# Altium PCB dakPCB.PcbDoc
Units mil, origin at the board's own origin, x right, y up, seen from the top; angles counter-clockwise.
Board outline 4000 x 5000 mil, 2 copper layers (Top Layer, Bottom Layer); 30 components, 47 nets, 235 pads, 0 vias.
Unrouted connection lines stored in the file: 159.
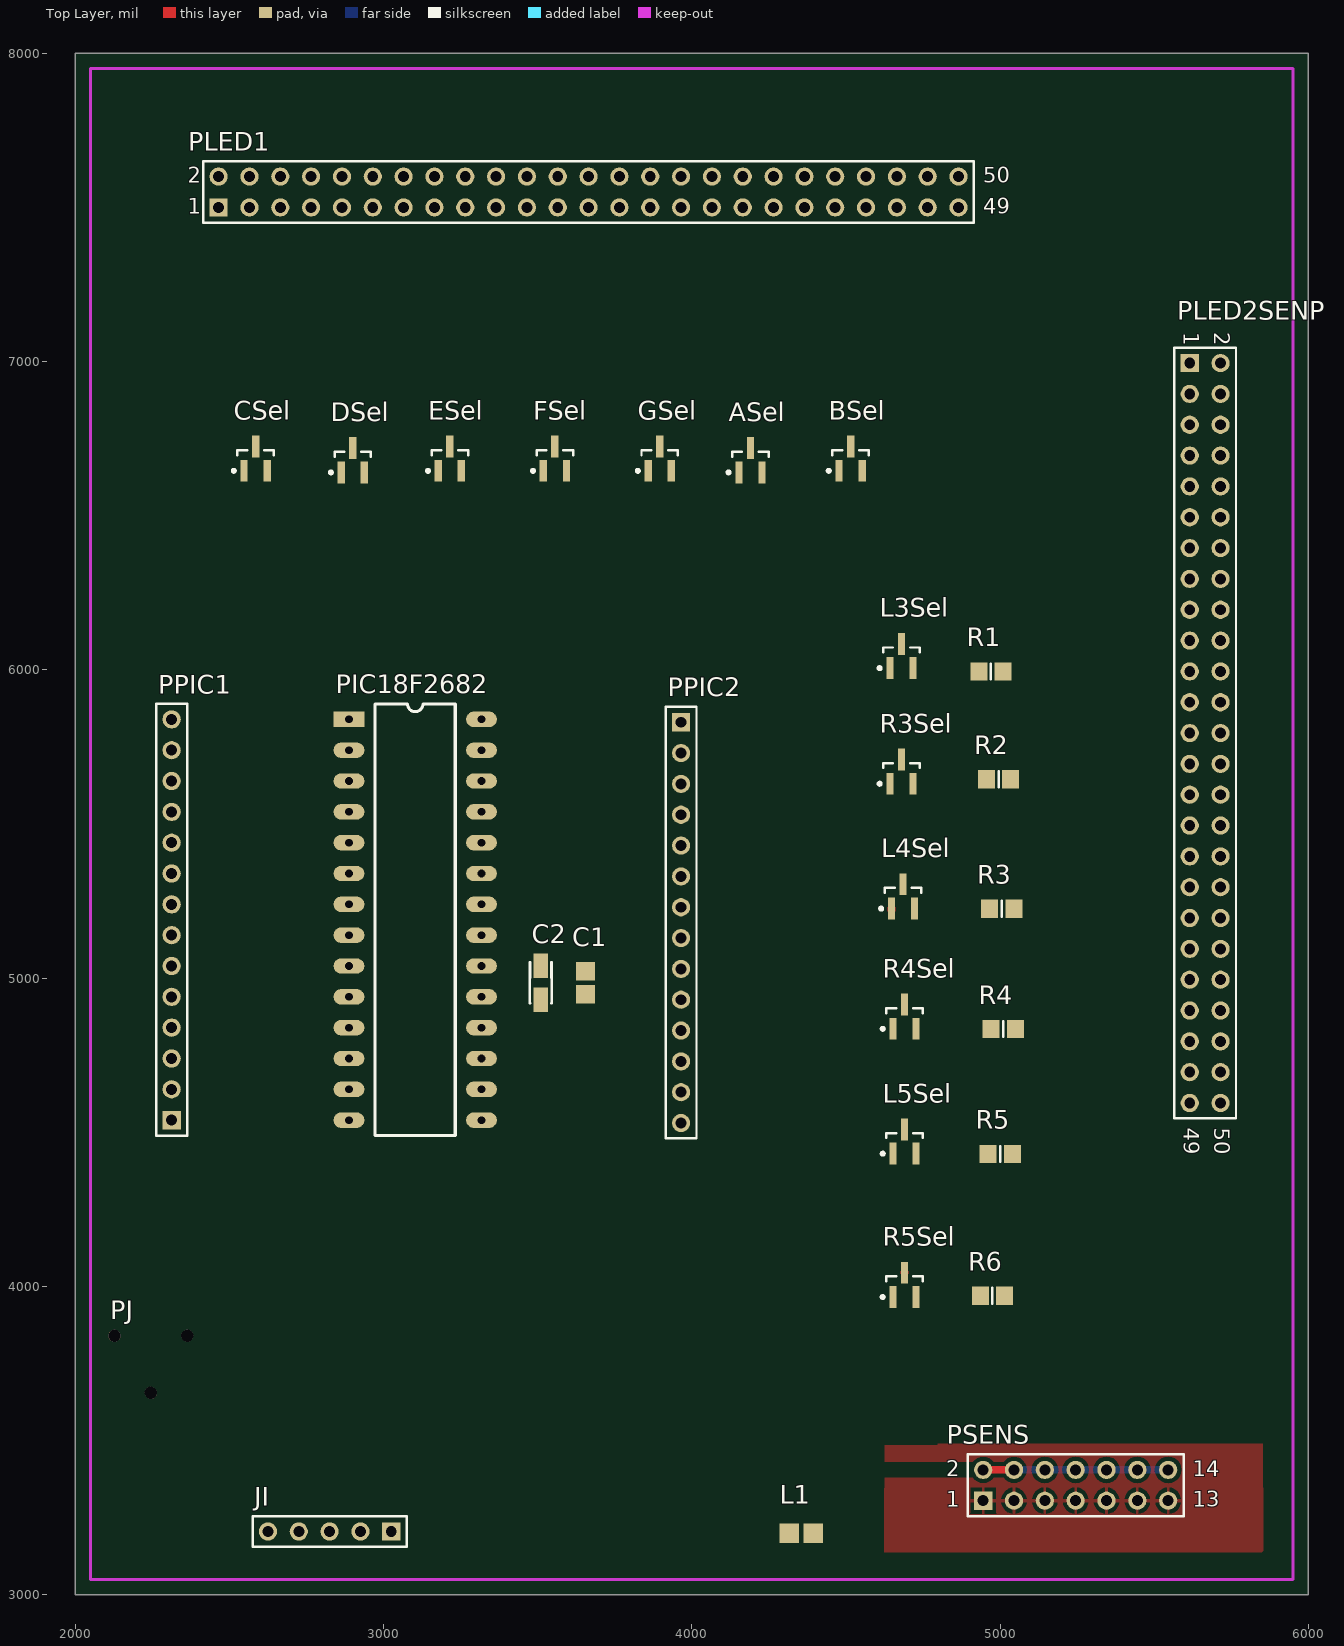
[diagram p0: Top Layer view]
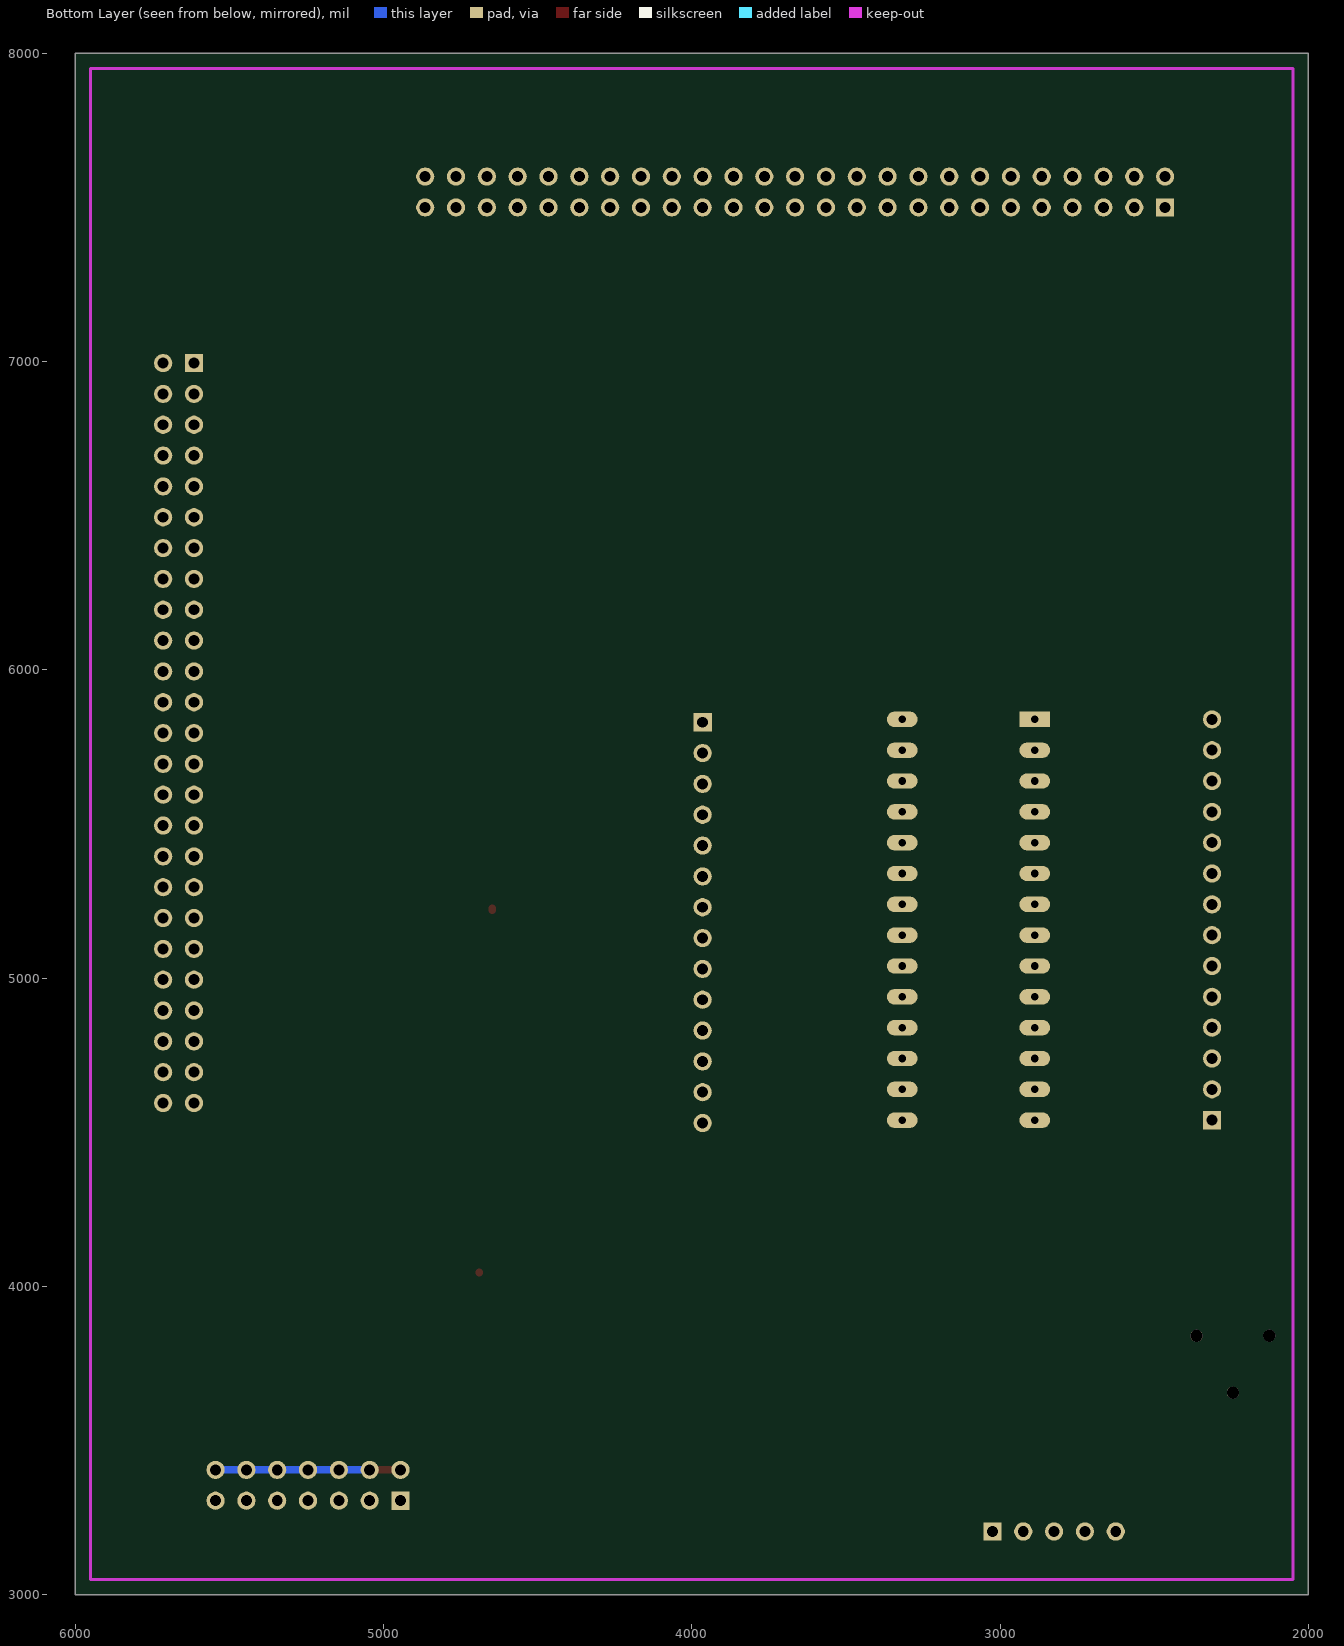
[diagram p1: Bottom Layer view, seen from below]

## Layer stack, top to bottom
Top Layer: signal copper 1.4
Dielectric: dielectric 12.6, FR-4, Dk 4.8
Bottom Layer: signal copper 1.4

## Board outline
2000,3000 6000,3000 6000,8000 2000,8000

## Design rules (kind name [scope] priority, off if disabled: settings)
Clearance [All] p1: gap=13
PolygonConnect [All] p1: connectstyle=Relief reliefconductorwidth=10 reliefentries=4 polygonreliefangle="90 Angle"
RoomDefinition pcblayout [InComponentClass('pcblayout')] p1: confinementstyle=ConfineIn formatcopy=TRUE lockcomponents=FALSE outline 6042.6,3249.37 13672.6,3249.37 13672.6,4769.37 6042.6,4769.37
RoutingVias [All] p1: holewidth=32 width=62 viastyle="Through Hole" minholewidth=28 minwidth=50 maxholewidth=28 maxwidth=50
SilkscreenOverComponentPads [All] p1: minsilkscreentomaskgap=10
SolderMaskExpansion [All] p1: expansion=4
Width [All] p1: maxlimit=25 minlimit=12 preferedwidth=25
27 further rules are at their usual default settings.

## Components (designator, comment, footprint, x,y, rotation, side; value= is the part's Value field where it differs from the comment)
ASel "FDN306P, A" SOT23-3M 4190,6680 r90 top
BSel "FDN306P, B" SOT23-3M 4515,6685 r90 top
C1 "Cap" CAPC2012M 3655,4985 r90 top
C2 "Cap Pol1" TC3216-1206 3510,4985 r270 top
CSel "FDN306P, C" SOT23-3M 2585,6685 r90 top
DSel "FDN306P, D" SOT23-3M 2900,6680 r90 top
ESel "FDN306P, E" SOT23-3M 3215,6685 r90 top
FSel "FDN306P, F" SOT23-3M 3555.63,6685 r90 top
GSel "FDN306P, G" SOT23-3M 3895.63,6685 r90 top
JI "Programming Header" HDR1X5 3025,3205 r180 top
L1 "Inductor" INDC2012M 4355,3200 r180 top
L3Sel "FDN339AN, 3L" SOT23-3M 4680,6045 r90 top
L4Sel "FDN339AN, 4L" SOT23-3M 4685,5265 r90 top
L5Sel "FDN339AN, 5L" SOT23-3M 4690,4470 r90 top
PIC18F2682 "PIC18F2682" DIP28 2887.6,5839.37 r0 top
PJ "Power Jack" "BARREL JACK" 2245,3840 r90 top
PLED1 "50x2 Pin Header, PLED1" HDR2X25 2465,7500 r0 top
PLED2SENP "50x2 Pin Header, PLED2SENP" HDR2X25 5615,6995 r270 top
PPIC1 "Header 14" HDR1X14 2312.6,4539.37 r90 top
PPIC2 "Header 14" HDR1X14 3965,5830 r270 top
PSENS "Header 7X2" HDR2X7 4945,3305 r0 top
R1 "R1" RESC2012M 4970,5995 r180 top
R2 "R2" RESC2012M 4995,5645 r180 top
R3 "R3" RESC2012M 5005,5225 r180 top
R3Sel "FDN339AN, 3R" SOT23-3M 4680,5670 r90 top
R4 "R4" RESC2012M 5010,4835 r180 top
R4Sel "FDN339AN, 4R" SOT23-3M 4690,4875 r90 top
R5 "R5" RESC2012M 5000,4430 r180 top
R5Sel "FDN339AN, 5R" SOT23-3M 4690,4005 r90 top
R6 "R6" RESC2012M 4975,3970 r180 top

## Footprints (in the part's own frame and the unit in brackets; to place one, negate y for a bottom-side part, rotate by r counter-clockwise, add the part's x,y. Pads: shape width x height; smd on the part's side, far side on the other; paste and mask are expansions set on the pad)
"BARREL JACK" [mm]
  round 1 hole 1: 1(0,-3) 2(0,3) 3(-4.7,0)
CAPC2012M [mm] "Chip Capacitor, Body 2.0x1.3mm, IPC Low Density"
  rect 1.5x1.6 smd: 1(-0.95,0) 2(0.95,0)
  body extent -1.1,-0.72 1.1,0.72, height 1.1
DIP28 [mil]
  rect 100x50 hole 25: 1(0,0)
  oval 100x50 hole 25: 2(0,-100) 3(0,-200) 4(0,-300) 5(0,-400) 6(0,-500) 7(0,-600) 8(0,-700) 9(0,-800) 10(0,-900) 11(0,-1000) 12(0,-1100) 13(0,-1200) 14(0,-1300) 15(430,-1300) 16(430,-1200) 17(430,-1100) 18(430,-1000) 19(430,-900) 20(430,-800) 21(430,-700) 22(430,-600) 23(430,-500) 24(430,-400) 25(430,-300) 26(430,-200) 27(430,-100) 28(430,0)
  silkscreen extent 85,-1350 345,50
HDR1X5 [mm] "Connector; Header; 5 Position"
  rect 1.5x1.5 hole 0.9: 1(0,0)
  round 1.5 hole 0.9: 2(2.54,0) 3(5.08,0) 4(7.62,0) 5(10.16,0)
  silkscreen extent -1.27,-1.27 11.43,1.27
HDR1X14 [mm] "Connector; Header; 14 Position"
  rect 1.5x1.5 hole 0.9: 1(0,0)
  round 1.5 hole 0.9: 2(2.54,0) 3(5.08,0) 4(7.62,0) 5(10.16,0) 6(12.7,0) 7(15.24,0) 8(17.78,0) 9(20.32,0) 10(22.86,0) 11(25.4,0) 12(27.94,0) 13(30.48,0) 14(33.02,0)
  silkscreen extent -1.27,-1.27 34.29,1.27
HDR2X7 [mm] "Connector; Header; 7x2 Position"
  rect 1.5x1.5 hole 0.9: 1(0,0)
  round 1.5 hole 0.9: 2(0,2.54) 3(2.54,0) 4(2.54,2.54) 5(5.08,0) 6(5.08,2.54) 7(7.62,0) 8(7.62,2.54) 9(10.16,0) 10(10.16,2.54) 11(12.7,0) 12(12.7,2.54) 13(15.24,0) 14(15.24,2.54)
  silkscreen extent -1.27,-1.27 16.51,3.81
HDR2X25 [mm] "Connector; Header; 25x2 Position"
  rect 1.5x1.5 hole 0.9: 1(0,0)
  round 1.5 hole 0.9: 2(0,2.54) 3(2.54,0) 4(2.54,2.54) 5(5.08,0) 6(5.08,2.54) 7(7.62,0) 8(7.62,2.54) 9(10.16,0) 10(10.16,2.54) 11(12.7,0) 12(12.7,2.54) 13(15.24,0) 14(15.24,2.54) 15(17.78,0) 16(17.78,2.54) 17(20.32,0) 18(20.32,2.54) 19(22.86,0) 20(22.86,2.54) 21(25.4,0) 22(25.4,2.54) 23(27.94,0) 24(27.94,2.54) 25(30.48,0) 26(30.48,2.54) 27(33.02,0) 28(33.02,2.54) 29(35.56,0) 30(35.56,2.54) 31(38.1,0) 32(38.1,2.54) 33(40.64,0) 34(40.64,2.54) 35(43.18,0) 36(43.18,2.54) 37(45.72,0) 38(45.72,2.54) 39(48.26,0) 40(48.26,2.54) 41(50.8,0) 42(50.8,2.54) 43(53.34,0) 44(53.34,2.54) 45(55.88,0) 46(55.88,2.54) 47(58.42,0) 48(58.42,2.54) 49(60.96,0) 50(60.96,2.54)
  silkscreen extent -1.27,-1.27 62.23,3.81
INDC2012M [mm] "Chip Inductor, Body 2.0x1.2mm, IPC Low Density"
  rect 1.6x1.6 smd: 1(-1,0) 2(1,0)
  body extent -1.1,-0.7 1.1,0.7, height 1.1
RESC2012M [mm]
  rect 1.4x1.5 smd: 1(-1,0) 2(1,0)
  silkscreen extent 0,-0.65 0,0.65, body extent -1.07,-0.7 1.07,0.7, height 0.7
SOT23-3M [mm] "SOT23, 3-Leads, Body 2.9x1.3mm, Pitch 0.95mm, Lead Span 2.5mm, IPC Low Density"
  rect 1.8x0.6 smd: 1(-1,0.95) 2(-1,-0.95) 3(1,0)
  silkscreen extent -1.12,-1.5 0.7,1.92, body extent -0.7,-1.5 0.7,1.5, height 1.1
TC3216-1206 [mm] "Capacitor, SM Tantalum; Body 3.2 x 1.6 mm (LxW typ)"
  rect 2x1.2 smd: 1(-1.4,0) 2(1.4,0)
  silkscreen extent -1.7,-0.9 1.7,0.9

## Part data
ASel BSel CSel DSel ESel FSel GSel: library part FDN304P, "Pch MOSFET"
C1: "Capacitor"
C2: "Polarized Capacitor (Radial)"
JI: library part "Header 5", "Header, 5-Pin"
L3Sel L4Sel L5Sel R3Sel R4Sel R5Sel: library part FDN339AN, "Nch MOSFET"
PPIC1 PPIC2: "Header, 14-Pin"
PSENS: "Header, 7-Pin, Dual row"
R1 R2 R3 R4 R5 R6: library part Res1, "Resistor"

## Nets (pads, with @x,y where several pads share a name; then routed paths per layer and width w, separated by ;. In a path a pad name is that pad's centre, name@x,y a point inside that pad or via, vN(x,y) a via of type N, cw(c..) or ccw(c..) an arc to the next point about the centre after c; other vN are vias at no path point)
GND: C1.1 C2.2 JI.5 L3Sel.3 L4Sel.3 L5Sel.3 PIC18F2682.8 PIC18F2682.19 PJ.2 PJ.3 PPIC1.7 PPIC2.10 PSENS.2 PSENS.4 PSENS.6 PSENS.8 PSENS.10 PSENS.12 PSENS.14 R3Sel.3 R4Sel.3 R5Sel.3 | length 600.6
  Top Layer w25: R5Sel.3 R5Sel.3@4690,4045 ; PSENS.2 PSENS.4
  Bottom Layer w25: PSENS.4 PSENS.6 PSENS.8 PSENS.10 PSENS.12 PSENS.14
NetASel_1: ASel.1 PIC18F2682.13 PPIC1.2
NetASel_2: ASel.2 PLED2SENP.14 PLED2SENP.16 PLED2SENP.18 PLED2SENP.20 PLED2SENP.22 PLED2SENP.24
NetBSel_1: BSel.1 PIC18F2682.14 PPIC1.1
NetBSel_2: BSel.2 PLED2SENP.26 PLED2SENP.28 PLED2SENP.30 PLED2SENP.32 PLED2SENP.34 PLED2SENP.36
NetCSel_1: CSel.1 PIC18F2682.6 PPIC1.9
NetCSel_2: CSel.2 PLED1.4 PLED1.6 PLED1.8 PLED1.10 PLED1.12 PLED1.14
NetDSel_1: DSel.1 PIC18F2682.10 PPIC1.5
NetDSel_2: DSel.2 PLED1.16 PLED1.18 PLED1.20 PLED1.22 PLED1.24 PLED1.26
NetESel_1: ESel.1 PIC18F2682.11 PPIC1.4
NetESel_2: ESel.2 PLED1.28 PLED1.30 PLED1.32 PLED1.34 PLED1.36 PLED1.38
NetFSel_1: FSel.1 PIC18F2682.12 PPIC1.3
NetFSel_2: FSel.2 PLED1.40 PLED1.42 PLED1.44 PLED1.46 PLED1.48 PLED1.50
NetGSel_1: GSel.1 JI.3 PIC18F2682.28 PPIC2.1
NetGSel_2: GSel.2 PLED2SENP.2 PLED2SENP.4 PLED2SENP.6 PLED2SENP.8 PLED2SENP.10 PLED2SENP.12
NetJI_2: JI.2 PIC18F2682.1 PPIC1.14
NetJI_4: JI.4 PIC18F2682.27 PPIC2.2 R3Sel.1
NetL1_1: L1.1 PSENS.1 PSENS.3 PSENS.5 PSENS.7 PSENS.9 PSENS.11 PSENS.13
NetL3Sel_1: L3Sel.1 PIC18F2682.26 PPIC2.3
NetL3Sel_2: L3Sel.2 R1.2
NetL4Sel_1: L4Sel.1 PIC18F2682.24 PPIC2.5 | length 4.6
  Top Layer w25: L4Sel.1@4647.6,5221 L4Sel.1
NetL4Sel_2: L4Sel.2 R3.2
NetL5Sel_1: L5Sel.1 PIC18F2682.16 PPIC2.13
NetL5Sel_2: L5Sel.2 R5.2
NetPIC18F2682_2: PIC18F2682.2 PPIC1.13
NetPIC18F2682_3: PIC18F2682.3 PPIC1.12
NetPIC18F2682_4: PIC18F2682.4 PPIC1.11
NetPIC18F2682_5: PIC18F2682.5 PPIC1.10
NetPIC18F2682_7: PIC18F2682.7 PPIC1.8
NetPIC18F2682_9: PIC18F2682.9 PPIC1.6
NetPIC18F2682_15: PIC18F2682.15 PPIC2.14 R5Sel.1
NetPIC18F2682_17: PIC18F2682.17 PPIC2.12
NetPIC18F2682_18: PIC18F2682.18 PPIC2.11
NetPIC18F2682_21: PIC18F2682.21 PPIC2.8
NetPIC18F2682_22: PIC18F2682.22 PPIC2.7
NetPIC18F2682_23: PIC18F2682.23 PPIC2.6
NetPIC18F2682_25: PIC18F2682.25 PPIC2.4
NetPLED1_3: PLED1.3 PLED1.15 PLED1.27 PLED1.39 PLED2SENP.1 PLED2SENP.13 PLED2SENP.25 R1.1
NetPLED1_5: PLED1.5 PLED1.17 PLED1.29 PLED1.41 PLED2SENP.3 PLED2SENP.15 PLED2SENP.27 R2.1
NetPLED1_7: PLED1.7 PLED1.19 PLED1.31 PLED1.43 PLED2SENP.5 PLED2SENP.17 PLED2SENP.29 R3.1
NetPLED1_9: PLED1.9 PLED1.21 PLED1.33 PLED1.45 PLED2SENP.7 PLED2SENP.19 PLED2SENP.31 R4.1
NetPLED1_11: PLED1.11 PLED1.23 PLED1.35 PLED1.47 PLED2SENP.9 PLED2SENP.21 PLED2SENP.33 R5.1
NetPLED1_13: PLED1.13 PLED1.25 PLED1.37 PLED1.49 PLED2SENP.11 PLED2SENP.23 PLED2SENP.35 R6.1
NetR2_2: R2.2 R3Sel.2
NetR4_2: R4.2 R4Sel.2
NetR5Sel_2: R5Sel.2 R6.2
VCC: ASel.3 BSel.3 C1.2 C2.1 CSel.3 DSel.3 ESel.3 FSel.3 GSel.3 JI.1 L1.2 PIC18F2682.20 PJ.1 PPIC2.9
pads on no net: PLED1.1 PLED1.2 PLED2SENP.37 PLED2SENP.38 PLED2SENP.39 PLED2SENP.40 PLED2SENP.41 PLED2SENP.42 PLED2SENP.43 PLED2SENP.44 PLED2SENP.45 PLED2SENP.46 PLED2SENP.47 PLED2SENP.48 PLED2SENP.49 PLED2SENP.50 R4Sel.1

## Polygon pours and split planes (outlines as drawn)
NetL1_1 on Top Layer "Top Layer-No Net" (solid, pour order 20): 4625,3485 4800,3485 4800,3145 4625,3145
NetL1_1 on Top Layer "Top Layer-No Net" (solid, pour order 22): 4623.76,3352.29 4628.76,3347.29 5853.76,3347.29 5853.76,3142.29 5848.76,3137.29 4623.76,3137.29
NetL1_1 on Top Layer "Top Layer-No Net" (solid, pour order 24): 4796.83,3489 5851.83,3489 5851.83,3266.47 4799.35,3266.47 4796.83,3269

## Keep-outs
Keep-Out Layer:
  lines w10: 2050,3050 2050,7950 5950,7950 5950,3050 2050,3050

## Silkscreen, mask and mechanical layers (free items; w line width, h text height)
Drill Drawing:
  text ".LEGEND" at 6197.6,3384.37 h60
  text "Drill Drawing." at 6197.6,3284.37 h60

## Dimensions
2050,3050 to 2050,7950 on Mechanical 1
2050,3050 to 5950,3050 on Mechanical 1

## Text inside footprints (layer, text, board x,y; h text height)
PLED1: Top Overlay "2" at 2365,7580 h50; Top Overlay "1" at 2365,7480 h50; Top Overlay "49" at 4945,7480 h50; Top Overlay "50" at 4945,7580 h50
PLED2SENP: Top Overlay "2" at 5695,7095 h50 r270; Top Overlay "1" at 5595,7095 h50 r270; Top Overlay "49" at 5595,4515 h50 r270; Top Overlay "50" at 5695,4515 h50 r270
PSENS: Top Overlay "2" at 4825,3385 h50; Top Overlay "1" at 4825,3285 h50; Top Overlay "14" at 5625,3385 h50; Top Overlay "13" at 5625,3285 h50